# Altium PCB SFCmasterD.PcbDoc (part 7 of 7)
Units mm, origin at the board's own origin, x right, y up, seen from the top; angles counter-clockwise.
Board outline 152.4 x 101.6 mm, 2 copper layers (Top Layer, Bottom Layer); 249 components, 250 nets, 987 pads, 265 vias.
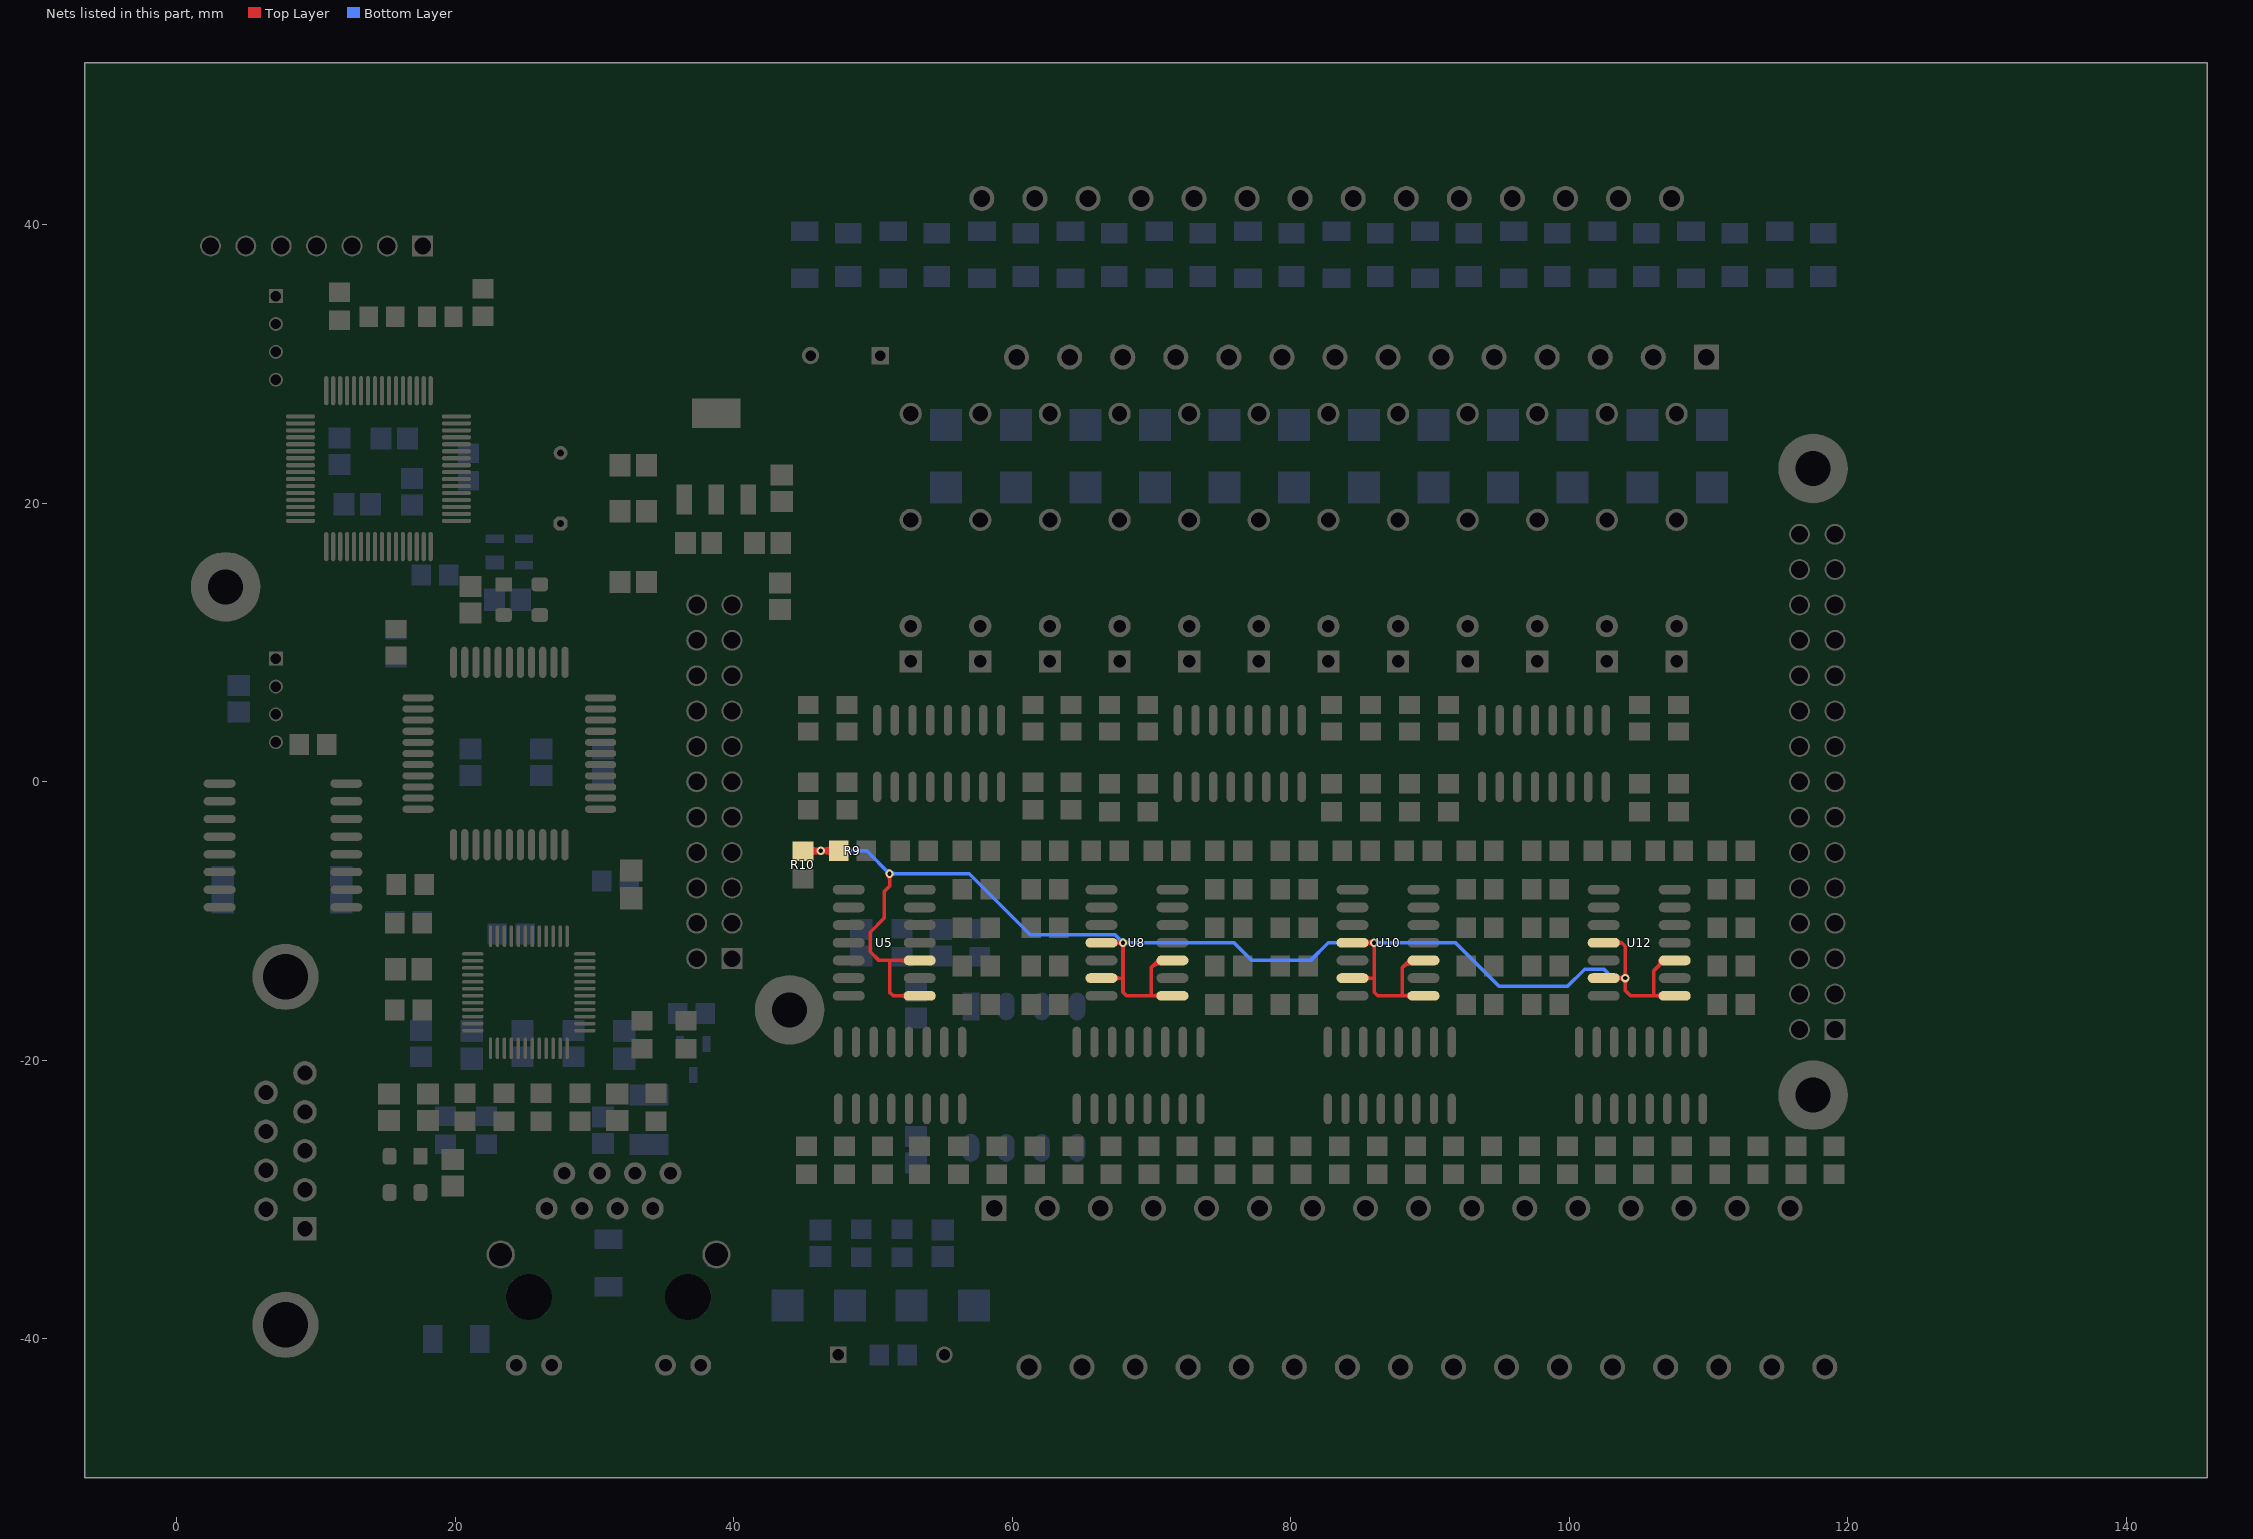
[diagram p7: the nets of this part, all layers, seen from the top]

## Via types
v1: diameter 0.6, hole 0.3, Top Layer to Bottom Layer, 265 vias

## Nets (pads, with @x,y where several pads share a name; then routed paths per layer and width w, separated by ;. In a path a pad name is that pad's centre, name@x,y a point inside that pad or via, vN(x,y) a via of type N, cw(c..) or ccw(c..) an arc to the next point about the centre after c; other vN are vias at no path point) (continued)
VREF: R9.2 R10.1 U5.8 U5.10 U8.4 U8.6 U8.8 U8.10 U10.4 U10.6 U10.8 U10.10 U12.4 U12.6 U12.8 U12.10 | length 157.1
  Top Layer w0.254: R10.1@44.958,-4.969 44.974,-4.953 R9.2@47.514,-4.953 ; R10.1@45.234,-5.195 cw(c45.817,-5.778) 45.817,-4.953 ; R10.1@45.234,-4.743 ccw(c45.74,-4.237) 45.74,-4.953 ; R10.1@45.413,-5.374 cw(c46.43,-6.391) v1@46.43,-4.953 ; R10.1@45.413,-4.564 ccw(c46.353,-3.624) v1@46.353,-4.953 ; 45.741,-5.138 ccw(c45.59,-4.576) v1@46.094,-4.867 ; 45.782,-4.8 cw(c45.649,-5.296) v1@46.094,-5.039 ; 45.913,-4.835 ccw(c45.997,-4.525) v1@46.157,-4.803 ; 45.965,-5.078 cw(c46.031,-5.322) v1@46.157,-5.103 ; v1@46.122,-5.075 ccw(c45.826,-5.371) 45.826,-4.953 ccw(c45.826,-4.535) v1@46.122,-4.831 ; v1@46.33,-5.103 cw(c46.489,-5.378) 46.571,-5.071 ; v1@46.33,-4.803 ccw(c46.489,-4.528) 46.571,-4.835 ; v1@46.366,-5.075 cw(c46.662,-5.371) 46.662,-4.953 cw(c46.662,-4.535) v1@46.366,-4.831 ; v1@46.394,-5.039 cw(c46.842,-5.298) 46.708,-4.798 ; v1@46.394,-4.867 ccw(c46.842,-4.608) 46.708,-5.108 ; R9.2@47.109,-5.358 ccw(c46.131,-6.336) 46.131,-4.953 ccw(c46.131,-3.57) R9.2@47.109,-4.548 ; R9.2@47.288,-5.179 ccw(c46.744,-5.723) 46.744,-4.953 ccw(c46.744,-4.183) R9.2@47.288,-4.727 ; v1@51.059,-6.726 cw(c50.763,-7.022) 51.181,-7.022 cw(c51.599,-7.022) v1@51.303,-6.726 ; 51.181,-12.827 51.181,-15.113 51.435,-15.367 U5.8@53.35,-15.367 ; v1(51.181,-6.604) 51.181,-7.493 50.8,-7.874 50.8,-9.779 49.784,-10.795 49.784,-12.192 50.419,-12.827 U5.10@53.35,-12.827 ; U5.8@52.392,-15.525 ccw(c52.012,-15.905) 52.012,-15.367 ccw(c52.012,-14.829) U5.8@52.392,-15.209 ; U5.10@52.392,-12.985 ccw(c52.012,-13.365) 52.012,-12.827 ccw(c52.012,-12.289) U5.10@52.392,-12.669 ; U8.6@66.395,-14.097 67.945,-14.097 ; U8.4@66.395,-11.557 v1(67.945,-11.557) 67.945,-14.097 ; U8.6@67.353,-14.255 cw(c67.733,-14.635) 67.733,-14.097 cw(c67.733,-13.559) U8.6@67.353,-13.939 ; U8.4@67.353,-11.715 cw(c67.733,-12.095) 67.733,-11.557 cw(c67.733,-11.019) U8.4@67.353,-11.399 ; 67.556,-11.605 cw(c67.626,-11.867) v1@67.821,-11.678 ; 67.556,-11.509 ccw(c67.626,-11.247) v1@67.821,-11.436 ; v1@67.823,-11.435 cw(c67.527,-11.139) 67.527,-11.557 cw(c67.527,-11.975) 67.823,-11.679 cw(c67.527,-11.975) 67.945,-11.975 cw(c68.363,-11.975) v1@68.067,-11.679 ; 69.977,-15.367 69.977,-13.335 ; U8.8@70.537,-15.525 ccw(c70.157,-15.905) 70.157,-15.367 ccw(c70.157,-14.829) U8.8@70.537,-15.209 ; U8.10@70.69,-13.05 ccw(c70.666,-14.024) 69.977,-13.335 ; U8.8@71.495,-15.367 68.199,-15.367 67.945,-15.113 67.945,-14.097 ; U8.10@71.495,-12.827 70.485,-12.827 69.977,-13.335 ; U10.6@84.429,-14.097 85.979,-14.097 ; U10.4@84.429,-11.557 v1(85.979,-11.557) 85.979,-14.097 ; U10.6@85.387,-14.255 cw(c85.767,-14.635) 85.767,-14.097 cw(c85.767,-13.559) U10.6@85.387,-13.939 ; U10.4@85.387,-11.715 cw(c85.767,-12.095) 85.767,-11.557 cw(c85.767,-11.019) U10.4@85.387,-11.399 ; 85.59,-11.605 cw(c85.66,-11.867) v1@85.855,-11.678 ; 85.59,-11.509 ccw(c85.66,-11.247) v1@85.855,-11.436 ; v1@85.857,-11.435 cw(c85.561,-11.139) 85.561,-11.557 cw(c85.561,-11.975) 85.857,-11.679 cw(c85.561,-11.975) 85.979,-11.975 cw(c86.397,-11.975) v1@86.101,-11.679 ; 88.008,-15.367 88.008,-13.338 ; U10.8@88.571,-15.525 ccw(c88.191,-15.905) 88.191,-15.367 ccw(c88.191,-14.829) U10.8@88.571,-15.209 ; U10.10@88.724,-13.05 ccw(c88.704,-14.034) 88.008,-13.338 ; U10.8@89.529,-15.367 86.233,-15.367 85.979,-15.113 85.979,-14.097 ; U10.10@89.529,-12.827 88.519,-12.827 88.008,-13.338 ; U12.6@102.463,-14.097 v1(104.013,-14.097) ; U12.4@102.463,-11.557 103.759,-11.557 ; U12.6@103.421,-14.255 cw(c103.801,-14.635) 103.801,-14.097 cw(c103.801,-13.559) U12.6@103.421,-13.939 ; U12.4@103.43,-11.705 cw(c103.759,-11.997) 103.759,-11.557 ; U12.4@103.43,-11.409 ccw(c103.759,-11.117) 103.759,-11.557 ; 103.624,-14.145 cw(c103.694,-14.407) v1@103.889,-14.218 ; 103.624,-14.049 ccw(c103.694,-13.787) v1@103.889,-13.976 ; v1@104.135,-14.219 ccw(c104.431,-14.515) 104.013,-14.515 ccw(c103.595,-14.515) 103.891,-14.219 ccw(c103.595,-14.515) 103.595,-14.097 ccw(c103.595,-13.679) 103.891,-13.975 ccw(c103.595,-13.679) 104.013,-13.679 ccw(c104.431,-13.679) v1@104.135,-13.975 ; 106.045,-15.367 106.045,-13.589 106.807,-12.827 U12.10@107.563,-12.827 ; 106.351,-13.283 ccw(c105.895,-12.827) U12.10@106.54,-12.827 ; 106.457,-13.177 cw(c106.763,-13.482) U12.10@106.763,-13.05 ; U12.8@106.605,-15.525 ccw(c106.225,-15.905) 106.225,-15.367 ccw(c106.225,-14.829) U12.8@106.605,-15.209 ; U12.8@107.563,-15.367 104.394,-15.367 104.013,-14.986 v1(104.013,-14.097) ; 103.759,-11.557 104.013,-11.811 v1(104.013,-14.097)
  Bottom Layer w0.254: v1(46.244,-4.953) 49.53,-4.953 v1(51.181,-6.604) 56.891,-6.604 61.271,-10.984 67.372,-10.984 v1(67.945,-11.557) 75.914,-11.557 77.184,-12.827 81.407,-12.827 82.677,-11.557 91.821,-11.557 94.949,-14.685 99.869,-14.685 101.092,-13.462 102.489,-13.462 103.124,-14.097 v1(104.013,-14.097) ; v1@46.366,-5.075 cw(c46.662,-5.371) 46.662,-4.953 cw(c46.662,-4.535) v1@46.366,-4.831 ; v1@51.008,-6.604 ccw(c50.59,-6.604) 50.886,-6.309 ccw(c51.181,-6.013) v1@51.181,-6.431 ; v1@51.303,-6.726 cw(c51.599,-7.022) 51.599,-6.604 cw(c51.599,-6.186) v1@51.303,-6.482 ; v1@67.772,-11.557 ccw(c67.354,-11.557) 67.65,-11.262 ccw(c67.945,-10.966) v1@67.945,-11.384 ; v1@68.067,-11.679 cw(c68.363,-11.975) 68.363,-11.557 cw(c68.363,-11.139) v1@68.067,-11.435 ; v1@85.857,-11.679 ccw(c85.561,-11.975) 85.561,-11.557 ccw(c85.561,-11.139) v1@85.857,-11.435 ; v1@86.101,-11.679 cw(c86.397,-11.975) 86.397,-11.557 cw(c86.397,-11.139) v1@86.101,-11.435 ; v1@103.891,-14.219 ccw(c103.595,-14.515) 103.595,-14.097 ccw(c103.595,-13.679) v1@103.891,-13.975
pads on no net: CN1.7 CN1.HM1 CN1.HM2 J1.9 U2.3 U2.4 U2.15 U2.26 U2.27 U2.41 U2.44 U2.45 U2.50 U2.54 U2.55 U2.56 U2.57 U2.58 U2.59 U3.7 U4.11 U4.14 U5.1 U5.2 U5.4 U5.5 U5.6 U5.7 U6.16 U6.17 U6.18 U6.22 U6.26 U6.27 U6.34 U6.35 U6.45 U7.1 U7.2 U7.3 U7.4 U7.13 U7.14 U7.15 U7.16 U33.4 Y2.1 Y3.1

## Polygon pours and split planes (outlines as drawn)
GND on Bottom Layer "Bottom Layer-GND" (solid, remove dead copper, pour order 9): 120.522,19.505 110.166,19.505 110.147,19.486 110.147,3.277 108.877,2.007 108.876,2.008 43.853,2.008 43.853,6.706 45.758,8.611 45.758,25.248 42.456,28.55 25.069,28.55 25.041,28.522 25.057,28.537 25.057,40.742 14.008,40.742 8.674,35.408 2.578,35.408 2.531,35.361 2.562,35.329 2.562,21.537 2.562,21.505 8.293,15.775 8.293,11.659 6.007,9.373 3.213,9.373 2.705,8.865 2.705,2.916 2.705,2.896 3.721,1.88 3.73,1.87 7.15,1.87 8.801,0.219 8.801,-8.915 8.801,-8.99 13.326,-13.515 13.373,-13.562 13.373,-32.41 20.358,-32.41 22.009,-30.759 25.057,-30.759 26.295,-31.997 26.355,-32.057 35.963,-32.057 38.757,-29.263 38.773,-29.248 38.773,-15.942 38.772,-15.942 36.09,-13.261 36.09,-9.578 36.09,-9.451 36.725,-8.816 36.825,-8.915 41.059,-8.915 41.059,-9.287 42.059,-10.288 42.186,-10.415 42.186,-21.008 113.021,-21.008 114.291,-19.738 120.522,-19.738
GNDA on Bottom Layer "Bottom Layer-GNDA" (solid, remove dead copper, pour order 13): 109.601,16.637 109.601,3.556 108.458,2.413 44.323,2.413 44.323,6.477 46.228,8.382 46.228,25.527 42.672,29.083 25.527,29.083 25.527,41.275 13.716,41.275 8.382,35.941 0.5,35.941 0.5,43.75 17.5,43.75 17.5,43 27,43 27,31 43.5,31 43.18,31 43.18,30.988 51.054,23.114 51.054,18.034 52.451,16.637
GNDA on Bottom Layer "Bottom Layer-GNDA" (solid, remove dead copper, pour order 15): 120.5,-20.193 114.3,-20.193 113.157,-21.336 41.529,-21.336 41.529,-10.541 40.386,-9.398 36.957,-9.398 36.576,-9.779 36.576,-12.954 36.576,-13.081 39.243,-15.748 39.243,-29.464 36.195,-32.512 26.162,-32.512 24.892,-31.242 22.225,-31.242 20.574,-32.893 12.827,-32.893 12.827,-13.589 8.255,-9.017 8.255,0 6.858,1.397 3.429,1.397 2.159,2.667 0.5,2.667 0.5,-43.75 13,-43.75 13,-43 21.463,-43 23.95,-40.513 38.1,-40.513 38.1,-40.575 41.275,-43.75 120.5,-43.75
GND on Top Layer "Top Layer-GND" (solid, remove dead copper, pour order 7): 120.616,19.576 120.609,19.569 110.177,19.569 110.177,6.188 110.185,6.18 117.932,6.18 117.932,1.354 115.646,1.354 113.868,3.132 110.058,3.132 108.915,1.989 108.854,2.05 43.931,2.05 43.931,6.749 45.836,8.654 45.836,25.291 42.534,28.593 25.135,28.593 25.135,40.785 14.086,40.785 8.745,35.444 2.608,35.444 2.608,21.529 2.656,21.481 8.371,15.766 8.371,11.702 8.371,11.682 6.045,9.355 3.378,9.355 2.743,8.72 2.743,2.878 3.759,1.862 7.188,1.862 8.839,0.211 8.839,-8.806 13.411,-13.378 13.411,-32.428 20.38,-32.428 20.388,-32.435 20.436,-32.483 20.436,-42.982 21.96,-42.982 22.116,-42.982 22.116,-43.732 38.851,-43.732 38.851,-15.984 36.057,-13.19 36.057,-9.634 36.819,-8.872 40.629,-8.872 42.28,-10.523 42.28,-20.937 113.039,-20.937 114.29,-19.687 114.309,-19.667 120.616,-19.667
GNDA on Top Layer "Top Layer-GNDA" (solid, remove dead copper, pour order 8): 19.812,-43 19.812,-32.893 12.954,-32.893 12.827,-32.893 12.827,-13.589 8.255,-9.017 8.255,0 6.858,1.397 3.429,1.397 2.159,2.667 2.159,9.017 3.048,9.906 5.715,9.906 7.747,11.938 7.747,15.621 2.032,21.336 2.032,35.814 2.159,35.941 8.382,35.941 13.716,41.275 25.527,41.275 25.527,29.083 42.672,29.083 46.228,25.527 46.228,8.382 44.323,6.477 44.323,2.413 108.458,2.413 109.601,3.556 109.728,3.683 110.109,3.683 114.046,3.683 115.824,1.905 117.348,1.905 117.348,5.715 109.855,5.715 109.601,5.969 109.601,16.637 52.451,16.637 51.054,18.034 51.054,23.114 43.18,30.988 43.18,31 27,31 27,43 17.5,43 17.5,43.75 0.5,43.75 0.5,-43.75 13,-43.75 13,-43 19.812,-43
GNDA on Top Layer "Top Layer-GNDA" (solid, remove dead copper, pour order 6): 120.451,-20.148 120.345,-20.042 114.485,-20.042 113.235,-21.291 41.099,-21.291 41.045,-21.236 40.972,-21.164 40.972,-9.607 40.718,-9.353 36.908,-9.353 36.781,-9.353 36.527,-9.607 36.527,-12.909 39.194,-15.576 39.194,-43.705 120.451,-43.705

## Keep-outs
Keep-Out Layer:
  lines w0.254: 0.5,-43.75 0.5,43.75 17.5,43.75 17.5,43 27,43 27,31 43.5,31 43.5,43.75 120.5,43.75 120.5,-43.75 22,-43.75 22,-43 13,-43 13,-43.75 0.5,-43.75

## Silkscreen, mask and mechanical layers (free items; w line width, h text height)
Top Overlay:
  lines w0.254: 0,0 1.27,0 ; 118,0 121,0
Mechanical 13:
  lines w0.508: 20.066,-43 20.066,-32.639 ; 38.989,-29.337 39.001,-43.688 ; 109.855,3.429 113.919,3.429 115.697,1.651 117.602,1.651 117.602,5.969 109.855,5.969
Mechanical 15:
  lines w0.254: 20.066,-43 21.643,-43 24.003,-40.64 37.973,-40.64 40.333,-43 120.5,-43 ; 43.5,43 120.5,43
  lines w0.508: 43.5,31 51.308,23.192 51.308,18.161 52.578,16.891 57.277,16.891 109.728,16.891 ; 120.396,-19.939 114.3,-19.939 113.157,-21.082 41.783,-21.082 41.783,-10.414 40.513,-9.144 36.83,-9.144 36.322,-9.652 36.322,-13.208 38.989,-15.875 38.989,-29.337 36.068,-32.258 26.162,-32.258 24.892,-30.988 22.225,-30.988 20.574,-32.639 13.081,-32.639 13.081,-13.462 11.938,-12.319 8.509,-8.89 8.509,0.127 6.985,1.651 3.556,1.651 2.413,2.794 2.413,8.89 3.175,9.652 5.842,9.652 8.001,11.811 8.001,15.748 6.604,17.145 2.286,21.463 2.286,35.687 8.509,35.687 11.303,38.481 13.843,41.021 25.273,41.021 25.273,28.829 42.545,28.829 45.974,25.4 45.974,20.828 45.974,8.509 44.069,6.604 44.069,2.159 108.585,2.159 109.855,3.429 109.855,19.812 120.396,19.812

## Dimensions
0.5,-43.75 to 0.5,43.75 on Mechanical 15
0.5,-43.75 to 120.5,-43.75 on Mechanical 15

## Text inside footprints (layer, text, board x,y; h text height)
CN1: Top Overlay "G" at 28.206,-42.112 h0.8; Top Overlay "Y" at 33.032,-42.112 h0.8; Top Overlay "H=13.50" at 28.46,-39.826 h0.8
J1: Top Overlay "6" at 3.888,-31.199 h0.8 r90; Top Overlay "9" at 3.761,-22.817 h0.8 r90; Top Overlay "5" at 13.032,-21.42 h0.8 r90; Top Overlay "1" at 13.159,-32.342 h0.8 r90
P1: Top Overlay "22" at 37.838,14.224 h0.8 r90; Top Overlay "21" at 40.378,14.224 h0.8 r90; Top Overlay "2" at 37.084,-14.605 h0.8 r90; Top Overlay "1" at 40.259,-14.478 h0.8 r90
P2: Top Overlay "1" at 120.142,-19.685 h0.8 r90; Top Overlay "2" at 115.951,-19.812 h0.8 r90; Top Overlay "29" at 120.269,19.177 h0.8 r90; Top Overlay "30" at 115.316,19.177 h0.8 r90